# EAGLE board Protoboard-02 (EAGLE 5.06), part 1 of 2
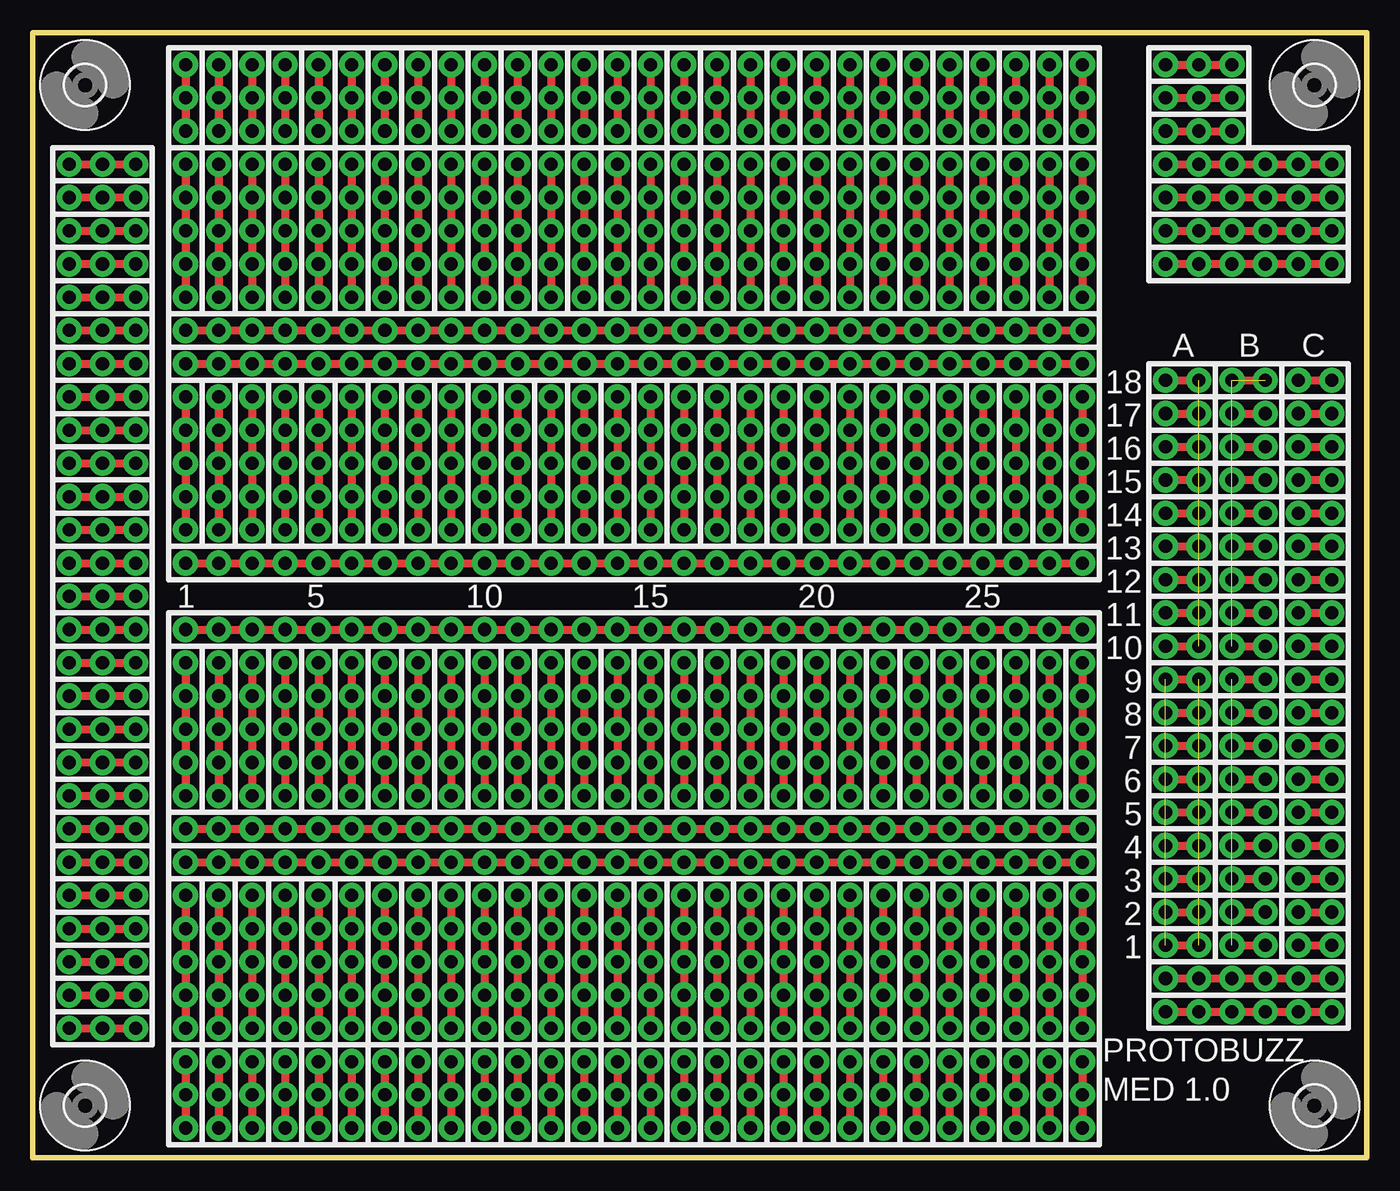
[diagram p0: board, top side]
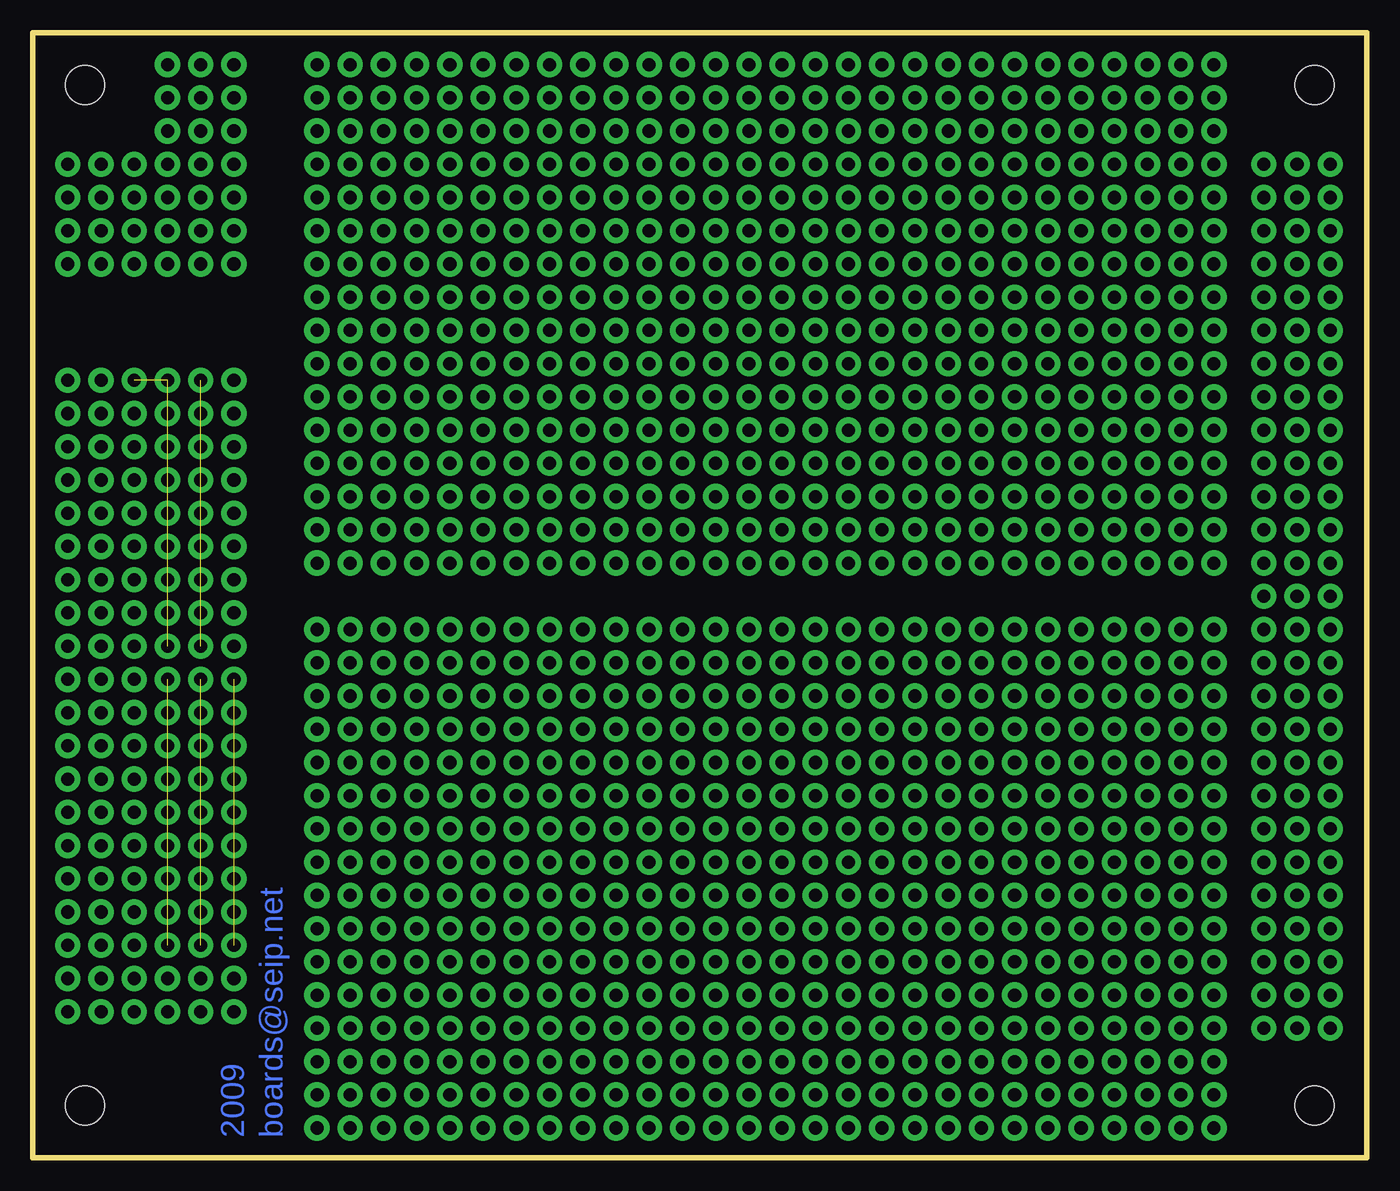
[diagram p1: board, bottom side, seen from below]

Size 102 x 86 mm. Coordinates in mm from the lower left corner, seen from the top.
Outline: 0,0 0,86 102,86 102,0 0,0
Copper layers (1*16): Top 0.035mm / dielectric 1.5mm / Bottom 0.035mm
Design rules "PCB-POOL": minimum track width 6mil, minimum drill 12mil, track to track 6mil, track to pad 6mil, pad to pad 6mil, via to via 6mil, smd to smd 6mil, copper to edge 20mil, drill to drill 8mil, minimum pad ring 8mil, minimum via ring 6mil, stop-mask expansion 3mil, vias tented up to drill 0mil, thermal gap 8mil
Holes 3 mm at 4,82 4,4 98,82 98,4

## Footprints (pad centres in the part's own frame; a part is rotated, then mirrored left to right if it is on the bottom)
3,0 = hole 3: 0,0

## Placement (x,y rotation side)
E$1  [3,0]  4,82 0 top
E$2  [3,0]  98,82 0 top
E$3  [3,0]  98,4 0 top
E$4  [3,0]  4,4 0 top

## Library data of the parts
E$1-E$4 = holes

## Tracks (layer width: path | path; a pad name or v marks a point on that pad's centre or on a via)
S$1  (via drill 1 pad 1.93)
  other vias: 89.15,68.33
S$2  (via drill 1 pad 1.93)
  other vias: 75.18,25.15
S$3  (via drill 1 pad 1.93)
  Top 0.61: v86.61,68.33 v99.31,68.33
S$4  (via drill 1 pad 1.93)
  other vias: 91.69,68.33
S$5  (via drill 1 pad 1.93)
  Top 0.61: v86.61,11.18 v99.31,11.18
S$6  (via drill 1 pad 1.93)
  other vias: 89.15,11.18
S$7  (via drill 1 pad 1.93)
  other vias: 91.69,11.18
S$8  (via drill 1 pad 1.93)  (8 unrouted)
  Top 0.61: v91.69,16.26 v94.23,16.26 | v91.69,36.58 v94.23,36.58 | v91.69,34.04 v94.23,34.04 | v91.69,31.5 v94.23,31.5 | v91.69,28.96 v94.23,28.96 | v91.69,26.42 v94.23,26.42 | v91.69,23.88 v94.23,23.88 | v91.69,21.34 v94.23,21.34 | v91.69,18.8 v94.23,18.8
S$9  (via drill 1 pad 1.93)
  other vias: 75.18,22.61
S$10  (via drill 1 pad 1.93)
  Top 0.61: v86.61,81.03 v91.69,81.03
S$11  (via drill 1 pad 1.93)
  other vias: 75.18,60.71
S$12  (via drill 1 pad 1.93)
  other vias: 96.77,68.33
S$13  (via drill 1 pad 1.93)
  Top 0.61: v86.61,78.49 v91.69,78.49
S$14  (via drill 1 pad 1.93)
  other vias: 89.15,83.57
S$15  (via drill 1 pad 1.93)
  Top 0.61: v86.61,83.57 v91.69,83.57
S$16  (via drill 1 pad 1.93)
  other vias: 5.33,9.91
S$17  (via drill 1 pad 1.93)
  Top 0.61: v86.61,75.95 v99.31,75.95
S$18  (via drill 1 pad 1.93)
  other vias: 89.15,81.03
S$19  (via drill 1 pad 1.93)
  other vias: 89.15,75.95
S$20  (via drill 1 pad 1.93)
  Top 0.61: v2.79,9.91 v7.87,9.91
S$21  (via drill 1 pad 1.93)
  Top 0.61: v2.79,12.45 v7.87,12.45
S$22  (via drill 1 pad 1.93)
  other vias: 5.33,12.45
S$23  (via drill 1 pad 1.93)
  other vias: 75.18,40.39
S$24  (via drill 1 pad 1.93)
  other vias: 91.69,75.95
S$25  (via drill 1 pad 1.93)
  Top 0.61: v2.79,14.99 6.6,14.99
S$26  (via drill 1 pad 1.93)
  other vias: 89.15,78.49
S$27  (via drill 1 pad 1.93)
  other vias: 80.26,12.45
S$28  (via drill 1 pad 1.93)
  Top 0.61: v5.33,14.99 v7.87,14.99
S$29  (via drill 1 pad 1.93)
  other vias: 5.33,17.53
S$30  (via drill 1 pad 1.93)  (8 unrouted)
  Top 0.61: v86.61,59.44 v89.15,59.44 | v86.61,56.9 v89.15,56.9 | v86.61,54.36 v89.15,54.36 | v86.61,51.82 v89.15,51.82 | v86.61,49.28 v89.15,49.28 | v86.61,46.74 v89.15,46.74 | v86.61,44.2 v89.15,44.2 | v86.61,41.66 v89.15,41.66 | v86.61,39.12 v89.15,39.12
S$31  (via drill 1 pad 1.93)  (16 unrouted)
  Top 0.406: v86.61,36.58 v89.15,36.58
  Top 0.61: v86.61,16.26 v89.15,16.26 | v86.61,36.58 v89.15,36.58 | v86.61,34.04 v89.15,34.04 | v86.61,31.5 v89.15,31.5 | v86.61,28.96 v89.15,28.96 | v86.61,26.42 v89.15,26.42 | v86.61,23.88 v89.15,23.88 | v86.61,21.34 v89.15,21.34 | v86.61,18.8 v89.15,18.8
S$32  (via drill 1 pad 1.93)
  Top 0.61: v2.79,17.53 v7.87,17.53
S$33  (via drill 1 pad 1.93)
  Top 0.61: v2.79,20.07 v7.87,20.07
S$34  (via drill 1 pad 1.93)
  other vias: 5.33,20.07
S$35  (via drill 1 pad 1.93)
  Top 0.61: v2.79,22.61 v7.87,22.61
S$36  (via drill 1 pad 1.93)
  Top 0.61: v86.61,73.41 v99.31,73.41
S$37  (via drill 1 pad 1.93)
  Top 0.61: v80.26,7.37 v80.26,2.29
S$38  (via drill 1 pad 1.93)
  other vias: 80.26,4.83
S$39  (via drill 1 pad 1.93)
  other vias: 89.15,73.41
S$40  (via drill 1 pad 1.93)
  other vias: 91.69,73.41
S$41  (via drill 1 pad 1.93)
  other vias: 5.33,22.61
S$42  (via drill 1 pad 1.93)
  other vias: 5.33,25.15
S$43  (via drill 1 pad 1.93)
  Top 0.61: v2.79,25.15 v7.87,25.15
S$44  (via drill 1 pad 1.93)
  Top 0.61: v2.79,27.69 v7.87,27.69
S$45  (via drill 1 pad 1.93)
  other vias: 5.33,27.69
S$46  (via drill 1 pad 1.93)
  other vias: 77.72,73.41
S$47  (via drill 1 pad 1.93)
  other vias: 77.72,70.87
S$48  (via drill 1 pad 1.93)
  other vias: 77.72,68.33
S$49  (via drill 1 pad 1.93)
  Top 0.61: v2.79,30.23 v7.87,30.23
S$50  (via drill 1 pad 1.93)
  other vias: 94.23,68.33
S$51  (via drill 1 pad 1.93)
  other vias: 5.33,30.23
S$53  (via drill 1 pad 1.93)
  other vias: 5.33,32.77
S$54  (via drill 1 pad 1.93)
  Top 0.61: v2.79,32.77 v7.87,32.77
S$56  (via drill 1 pad 1.93)
  Top 0.61: v2.79,35.31 v7.87,35.31
S$57  (via drill 1 pad 1.93)
  other vias: 5.33,35.31
S$58  (via drill 1 pad 1.93)
  Top 0.61: v2.79,37.85 v7.87,37.85
S$59  (via drill 1 pad 1.93)
  other vias: 5.33,37.85
S$60  (via drill 1 pad 1.93)
  other vias: 5.33,40.39
S$61  (via drill 1 pad 1.93)
  Top 0.61: v2.79,40.39 v7.87,40.39
S$62  (via drill 1 pad 1.93)
  Top 0.61: v77.72,75.95 v77.72,65.79
S$63  (via drill 1 pad 1.93)
  Top 0.61: v80.26,75.95 v80.26,65.79
S$64  (via drill 1 pad 1.93)
  Top 0.61: v2.79,42.93 v7.87,42.93
S$65  (via drill 1 pad 1.93)
  other vias: 5.33,42.93
S$66  (via drill 1 pad 1.93)
  other vias: 77.72,81.03
S$67  (via drill 1 pad 1.93)
  Top 0.61: v77.72,83.57 v77.72,78.49
S$68  (via drill 1 pad 1.93)
  Top 0.61: v80.26,83.57 v80.26,78.49
S$69  (via drill 1 pad 1.93)
  other vias: 80.26,81.03
S$70  (via drill 1 pad 1.93)
  Top 0.61: v2.79,45.47 v7.87,45.47
S$71  (via drill 1 pad 1.93)
  other vias: 80.26,73.41
S$72  (via drill 1 pad 1.93)
  other vias: 80.26,70.87
S$73  (via drill 1 pad 1.93)
  other vias: 80.26,68.33
S$74  (via drill 1 pad 1.93)
  other vias: 5.33,45.47
S$77  (via drill 1 pad 1.93)
  other vias: 5.33,48.01
S$81  (via drill 1 pad 1.93)
  Top 0.61: v2.79,48.01 v7.87,48.01
S$87  (via drill 1 pad 1.93)
  other vias: 77.72,60.71
S$89  (via drill 1 pad 1.93)
  Top 0.61: v80.26,58.17 v80.26,48.01
S$90  (via drill 1 pad 1.93)
  Top 0.61: v77.72,58.17 v77.72,48.01
S$91  (via drill 1 pad 1.93)
  Top 0.61: v2.79,50.55 v7.87,50.55
S$93  (via drill 1 pad 1.93)
  other vias: 77.72,40.39
S$94  (via drill 1 pad 1.93)
  other vias: 77.72,25.15
S$95  (via drill 1 pad 1.93)
  other vias: 5.33,50.55
S$96  (via drill 1 pad 1.93)
  Top 0.61: v2.79,53.09 v7.87,53.09
S$97  (via drill 1 pad 1.93)
  other vias: 5.33,53.09
S$98  (via drill 1 pad 1.93)
  other vias: 5.33,55.63
S$99  (via drill 1 pad 1.93)
  Top 0.61: v2.79,55.63 v7.87,55.63
S$100  (via drill 1 pad 1.93)
  Top 0.61: v2.79,58.17 v7.87,58.17
S$101  (via drill 1 pad 1.93)
  other vias: 5.33,58.17
S$102  (via drill 1 pad 1.93)
  Top 0.61: v2.79,60.71 v7.87,60.71
S$103  (via drill 1 pad 1.93)
  other vias: 5.33,60.71
S$104  (via drill 1 pad 1.93)
  other vias: 5.33,63.25
S$105  (via drill 1 pad 1.93)
  Top 0.61: v2.79,63.25 v7.87,63.25
S$106  (via drill 1 pad 1.93)
  Top 0.61: v2.79,65.79 v7.87,65.79
S$107  (via drill 1 pad 1.93)
  other vias: 5.33,65.79
S$108  (via drill 1 pad 1.93)
  Top 0.61: v2.79,68.33 v7.87,68.33
S$109  (via drill 1 pad 1.93)
  other vias: 5.33,68.33
S$110  (via drill 1 pad 1.93)
  other vias: 5.33,70.87
S$111  (via drill 1 pad 1.93)
  Top 0.61: v2.79,70.87 v7.87,70.87
S$112  (via drill 1 pad 1.93)
  Top 0.61: v2.79,73.41 v7.87,73.41
S$113  (via drill 1 pad 1.93)
  other vias: 5.33,73.41
S$114  (via drill 1 pad 1.93)
  Top 0.61: v2.79,75.95 v7.87,75.95
S$115  (via drill 1 pad 1.93)
  other vias: 5.33,75.95
S$175  (via drill 1 pad 1.93)
  other vias: 77.72,22.61
S$176  (via drill 1 pad 1.93)
  other vias: 77.72,63.25
S$177  (via drill 1 pad 1.93)
  other vias: 77.72,55.63
S$178  (via drill 1 pad 1.93)
  other vias: 77.72,53.09
S$184  (via drill 1 pad 1.93)
  other vias: 77.72,50.55
S$191  (via drill 1 pad 1.93)
  other vias: 77.72,45.47
S$192  (via drill 1 pad 1.93)
  other vias: 75.18,63.25
S$196  (via drill 1 pad 1.93)
  Top 0.61: v77.72,37.85 v77.72,27.69
S$197  (via drill 1 pad 1.93)
  other vias: 75.18,45.47
S$202  (via drill 1 pad 1.93)
  other vias: 77.72,35.31
S$207  (via drill 1 pad 1.93)
  other vias: 77.72,32.77
S$208  (via drill 1 pad 1.93)
  other vias: 77.72,30.23
S$210  (via drill 1 pad 1.93)
  Top 0.61: v77.72,20.07 v77.72,9.91
S$211  (via drill 1 pad 1.93)
  other vias: 77.72,17.53
S$216  (via drill 1 pad 1.93)
  other vias: 77.72,14.99
S$233  (via drill 1 pad 1.93)
  other vias: 80.26,63.25
S$234  (via drill 1 pad 1.93)
  other vias: 80.26,55.63
S$235  (via drill 1 pad 1.93)
  other vias: 80.26,53.09
S$261  (via drill 1 pad 1.93)
  other vias: 80.26,50.55
S$263  (via drill 1 pad 1.93)
  other vias: 80.26,45.47
S$286  (via drill 1 pad 1.93)
  Top 0.61: v80.26,37.85 v80.26,27.69
S$287  (via drill 1 pad 1.93)
  other vias: 80.26,35.31
S$288  (via drill 1 pad 1.93)
  other vias: 80.26,32.77
S$292  (via drill 1 pad 1.93)
  other vias: 80.26,30.23
S$323  (via drill 1 pad 1.93)
  Top 0.61: v80.26,20.07 v80.26,9.91
S$324  (via drill 1 pad 1.93)
  other vias: 80.26,17.53
S$347  (via drill 1 pad 1.93)
  other vias: 80.26,14.99
S$452  (via drill 1 pad 1.93)
  Top 0.61: v11.68,60.71 v80.26,60.71
S$453  (via drill 1 pad 1.93)
  Top 0.61: v11.68,58.17 v11.68,48.01
S$464  (via drill 1 pad 1.93)
  Top 0.61: v11.68,40.39 v80.26,40.39
S$474  (via drill 1 pad 1.93)
  Top 0.61: v11.68,25.15 v80.26,25.15
S$475  (via drill 1 pad 1.93)
  Top 0.61: v11.68,22.61 v80.26,22.61
S$523  (via drill 1 pad 1.93)
  Top 0.61: v11.68,75.95 v11.68,65.79
S$527  (via drill 1 pad 1.93)
  Top 0.61: v11.68,83.57 v11.68,78.49
S$528  (via drill 1 pad 1.93)
  other vias: 11.68,81.03
S$530  (via drill 1 pad 1.93)
  other vias: 11.68,73.41
S$531  (via drill 1 pad 1.93)
  other vias: 11.68,70.87
S$532  (via drill 1 pad 1.93)
  other vias: 11.68,68.33
S$534  (via drill 1 pad 1.93)
  Top 0.61: v11.68,63.25 80.26,63.25 80.26,62.99 80.52,62.99 80.52,63.25
S$535  (via drill 1 pad 1.93)
  other vias: 11.68,55.63
S$536  (via drill 1 pad 1.93)
  other vias: 11.68,53.09
S$537  (via drill 1 pad 1.93)
  other vias: 11.68,50.55
S$539  (via drill 1 pad 1.93)
  Top 0.61: v11.68,45.47 80.26,45.47 80.26,45.72 80.26,45.21
S$540  (via drill 1 pad 1.93)
  Top 0.61: v11.68,37.85 v11.68,27.69
S$541  (via drill 1 pad 1.93)
  other vias: 11.68,35.31
S$542  (via drill 1 pad 1.93)
  other vias: 11.68,32.77
S$543  (via drill 1 pad 1.93)
  other vias: 11.68,30.23
S$545  (via drill 1 pad 1.93)
  Top 0.61: v11.68,20.07 v11.68,9.91
S$546  (via drill 1 pad 1.93)
  other vias: 11.68,17.53
S$547  (via drill 1 pad 1.93)
  other vias: 11.68,14.99
S$548  (via drill 1 pad 1.93)
  other vias: 11.68,12.45
S$550  (via drill 1 pad 1.93)
  other vias: 94.23,75.95
S$552  (via drill 1 pad 1.93)
  other vias: 96.77,75.95
S$553  (via drill 1 pad 1.93)
  Top 0.61: v11.68,7.37 v11.68,2.29
S$554  (via drill 1 pad 1.93)
  other vias: 11.68,4.83
S$556  (via drill 1 pad 1.93)
  Top 0.61: v14.22,83.57 v14.22,78.49
S$557  (via drill 1 pad 1.93)
  other vias: 14.22,81.03
S$559  (via drill 1 pad 1.93)
  other vias: 14.22,73.41
S$560  (via drill 1 pad 1.93)
  other vias: 14.22,70.87
S$561  (via drill 1 pad 1.93)
  other vias: 14.22,68.33
S$563  (via drill 1 pad 1.93)
  other vias: 14.22,63.25
S$564  (via drill 1 pad 1.93)
  other vias: 14.22,60.71
S$565  (via drill 1 pad 1.93)
  other vias: 16.76,60.71
S$566  (via drill 1 pad 1.93)
  other vias: 19.3,60.71
S$567  (via drill 1 pad 1.93)
  Top 0.61: v19.3,58.17 v19.3,48.01
S$568  (via drill 1 pad 1.93)
  Top 0.61: v16.76,58.17 v16.76,48.01
S$569  (via drill 1 pad 1.93)
  Top 0.61: v14.22,58.17 v14.22,48.01
S$570  (via drill 1 pad 1.93)
  other vias: 14.22,55.63
S$571  (via drill 1 pad 1.93)
  other vias: 14.22,53.09
S$572  (via drill 1 pad 1.93)
  other vias: 14.22,50.55
S$574  (via drill 1 pad 1.93)
  other vias: 14.22,45.47
S$578  (via drill 1 pad 1.93)
  other vias: 19.3,40.39
S$579  (via drill 1 pad 1.93)
  other vias: 16.76,40.39
S$580  (via drill 1 pad 1.93)
  other vias: 14.22,40.39
S$581  (via drill 1 pad 1.93)
  Top 0.61: v14.22,37.85 v14.22,27.69
S$582  (via drill 1 pad 1.93)
  other vias: 14.22,35.31
S$583  (via drill 1 pad 1.93)
  other vias: 14.22,32.77
S$584  (via drill 1 pad 1.93)
  other vias: 14.22,30.23
S$586  (via drill 1 pad 1.93)
  other vias: 14.22,25.15
S$587  (via drill 1 pad 1.93)
  other vias: 16.76,25.15
S$588  (via drill 1 pad 1.93)
  other vias: 19.3,25.15
S$589  (via drill 1 pad 1.93)
  other vias: 19.3,22.61
S$590  (via drill 1 pad 1.93)
  other vias: 16.76,22.61
S$591  (via drill 1 pad 1.93)
  other vias: 14.22,22.61
S$592  (via drill 1 pad 1.93)
  Top 0.61: v14.22,20.07 v14.22,9.91
S$593  (via drill 1 pad 1.93)
  other vias: 14.22,17.53
S$594  (via drill 1 pad 1.93)
  other vias: 14.22,14.99
S$595  (via drill 1 pad 1.93)
  other vias: 14.22,12.45
S$606  (via drill 1 pad 1.93)
  Top 0.61: v14.22,7.37 v14.22,2.29
S$607  (via drill 1 pad 1.93)
  other vias: 14.22,4.83
S$608  (via drill 1 pad 1.93)
  other vias: 16.76,73.41
S$609  (via drill 1 pad 1.93)
  other vias: 16.76,70.87
S$610  (via drill 1 pad 1.93)
  other vias: 16.76,68.33
S$612  (via drill 1 pad 1.93)
  other vias: 16.76,63.25
S$613  (via drill 1 pad 1.93)
  other vias: 16.76,55.63
S$614  (via drill 1 pad 1.93)
  other vias: 16.76,53.09
S$615  (via drill 1 pad 1.93)
  other vias: 16.76,50.55
S$617  (via drill 1 pad 1.93)
  other vias: 16.76,45.47
S$618  (via drill 1 pad 1.93)
  Top 0.61: v16.76,37.85 v16.76,27.69
S$619  (via drill 1 pad 1.93)
  other vias: 16.76,35.31
S$620  (via drill 1 pad 1.93)
  other vias: 16.76,32.77
S$621  (via drill 1 pad 1.93)
  other vias: 16.76,30.23
S$623  (via drill 1 pad 1.93)
  Top 0.61: v16.76,20.07 v16.76,9.91
S$624  (via drill 1 pad 1.93)
  other vias: 16.76,17.53
S$625  (via drill 1 pad 1.93)
  other vias: 16.76,14.99
S$626  (via drill 1 pad 1.93)
  other vias: 16.76,12.45
S$631  (via drill 1 pad 1.93)
  Top 0.61: v16.76,7.37 v16.76,2.29
S$632  (via drill 1 pad 1.93)
  other vias: 16.76,4.83
S$635  (via drill 1 pad 1.93)
  Top 0.61: v14.22,75.95 v14.22,65.79
S$636  (via drill 1 pad 1.93)
  Top 0.61: v16.76,75.95 v16.76,65.79
S$637  (via drill 1 pad 1.93)
  Top 0.61: v19.3,75.95 19.3,67.06
S$639  (via drill 1 pad 1.93)
  other vias: 16.76,81.03
S$640  (via drill 1 pad 1.93)
  Top 0.61: v16.76,83.57 v16.76,78.49
S$641  (via drill 1 pad 1.93)
  Top 0.61: v19.3,83.57 v19.3,78.49
S$642  (via drill 1 pad 1.93)
  other vias: 19.3,81.03
S$644  (via drill 1 pad 1.93)
  other vias: 19.3,73.41
S$645  (via drill 1 pad 1.93)
  other vias: 19.3,70.87
S$646  (via drill 1 pad 1.93)
  Top 0.61: v19.3,68.33 v19.3,65.79
S$648  (via drill 1 pad 1.93)
  other vias: 19.3,63.25
S$649  (via drill 1 pad 1.93)
  other vias: 19.3,55.63
S$650  (via drill 1 pad 1.93)
  other vias: 19.3,53.09
S$651  (via drill 1 pad 1.93)
  other vias: 19.3,50.55
S$653  (via drill 1 pad 1.93)
  other vias: 19.3,45.47
S$654  (via drill 1 pad 1.93)
  Top 0.61: v19.3,37.85 v19.3,27.69
S$655  (via drill 1 pad 1.93)
  other vias: 19.3,35.31
S$656  (via drill 1 pad 1.93)
  other vias: 19.3,32.77
S$657  (via drill 1 pad 1.93)
  other vias: 19.3,30.23
S$659  (via drill 1 pad 1.93)
  Top 0.61: v19.3,20.07 v19.3,9.91
S$660  (via drill 1 pad 1.93)
  other vias: 19.3,17.53
S$661  (via drill 1 pad 1.93)
  other vias: 19.3,14.99
S$662  (via drill 1 pad 1.93)
  other vias: 19.3,12.45
S$665  (via drill 1 pad 1.93)
  other vias: 94.23,73.41
S$666  (via drill 1 pad 1.93)
  other vias: 96.77,73.41
S$667  (via drill 1 pad 1.93)
  Top 0.61: v19.3,7.37 v19.3,2.29
S$668  (via drill 1 pad 1.93)
  other vias: 19.3,4.83
S$670  (via drill 1 pad 1.93)
  Top 0.61: v21.84,83.57 21.84,79.76
S$671  (via drill 1 pad 1.93)
  Top 0.61: v21.84,81.03 v21.84,78.49
S$673  (via drill 1 pad 1.93)
  other vias: 21.84,73.41
S$674  (via drill 1 pad 1.93)
  other vias: 21.84,70.87
S$675  (via drill 1 pad 1.93)
  other vias: 21.84,68.33
S$677  (via drill 1 pad 1.93)
  other vias: 21.84,63.25
S$678  (via drill 1 pad 1.93)
  other vias: 21.84,60.71
S$679  (via drill 1 pad 1.93)
  other vias: 24.38,60.71
S$680  (via drill 1 pad 1.93)
  other vias: 26.92,60.71
S$681  (via drill 1 pad 1.93)
  Top 0.61: v26.92,58.17 v26.92,48.01
S$682  (via drill 1 pad 1.93)
  Top 0.61: v24.38,58.17 v24.38,48.01
S$683  (via drill 1 pad 1.93)
  Top 0.61: v21.84,58.17 v21.84,48.01
S$684  (via drill 1 pad 1.93)
  other vias: 21.84,55.63
S$685  (via drill 1 pad 1.93)
  other vias: 21.84,53.09
S$686  (via drill 1 pad 1.93)
  other vias: 21.84,50.55
S$688  (via drill 1 pad 1.93)
  other vias: 21.84,45.47
S$692  (via drill 1 pad 1.93)
  other vias: 26.92,40.39
S$693  (via drill 1 pad 1.93)
  other vias: 24.38,40.39
S$694  (via drill 1 pad 1.93)
  other vias: 21.84,40.39
S$695  (via drill 1 pad 1.93)
  Top 0.61: v21.84,37.85 v21.84,27.69
S$696  (via drill 1 pad 1.93)
  other vias: 21.84,35.31
S$697  (via drill 1 pad 1.93)
  other vias: 21.84,32.77
S$698  (via drill 1 pad 1.93)
  other vias: 21.84,30.23
S$700  (via drill 1 pad 1.93)
  other vias: 21.84,25.15
S$701  (via drill 1 pad 1.93)
  other vias: 24.38,25.15
S$702  (via drill 1 pad 1.93)
  other vias: 26.92,25.15
S$703  (via drill 1 pad 1.93)
  other vias: 26.92,22.61
S$704  (via drill 1 pad 1.93)
  other vias: 24.38,22.61
S$705  (via drill 1 pad 1.93)
  other vias: 21.84,22.61
S$706  (via drill 1 pad 1.93)
  Top 0.61: v21.84,20.07 v21.84,9.91
S$707  (via drill 1 pad 1.93)
  other vias: 21.84,17.53
S$708  (via drill 1 pad 1.93)
  other vias: 21.84,14.99
S$709  (via drill 1 pad 1.93)
  other vias: 21.84,12.45
S$717  (via drill 1 pad 1.93)
  other vias: 96.77,70.87
S$718  (via drill 1 pad 1.93)
  other vias: 94.23,70.87
S$719  (via drill 1 pad 1.93)
  other vias: 94.23,13.72
S$720  (via drill 1 pad 1.93)
  Top 0.61: v21.84,7.37 v21.84,2.29
S$721  (via drill 1 pad 1.93)
  other vias: 21.84,4.83
S$722  (via drill 1 pad 1.93)
  other vias: 24.38,73.41
S$723  (via drill 1 pad 1.93)
  other vias: 24.38,70.87
S$724  (via drill 1 pad 1.93)
  other vias: 24.38,68.33
S$726  (via drill 1 pad 1.93)
  other vias: 24.38,63.25
S$727  (via drill 1 pad 1.93)
  other vias: 24.38,55.63
S$728  (via drill 1 pad 1.93)
  other vias: 24.38,53.09
S$729  (via drill 1 pad 1.93)
  other vias: 24.38,50.55
S$731  (via drill 1 pad 1.93)
  other vias: 24.38,45.47
S$732  (via drill 1 pad 1.93)
  Top 0.61: v24.38,37.85 v24.38,27.69
S$733  (via drill 1 pad 1.93)
  other vias: 24.38,35.31
S$734  (via drill 1 pad 1.93)
  other vias: 24.38,32.77
S$735  (via drill 1 pad 1.93)
  other vias: 24.38,30.23
S$737  (via drill 1 pad 1.93)
  Top 0.61: v24.38,20.07 v24.38,9.91
S$738  (via drill 1 pad 1.93)
  other vias: 24.38,17.53
S$739  (via drill 1 pad 1.93)
  other vias: 24.38,14.99
S$740  (via drill 1 pad 1.93)
  other vias: 24.38,12.45
S$743  (via drill 1 pad 1.93)
  other vias: 96.77,13.72
S$745  (via drill 1 pad 1.93)
  Top 0.61: v24.38,7.37 v24.38,2.29
S$746  (via drill 1 pad 1.93)
  other vias: 24.38,4.83
S$749  (via drill 1 pad 1.93)
  Top 0.61: v21.84,75.95 v21.84,65.79
S$750  (via drill 1 pad 1.93)
  Top 0.61: v24.38,75.95 v24.38,65.79
S$751  (via drill 1 pad 1.93)
  Top 0.61: v26.92,75.95 v26.92,65.79
S$753  (via drill 1 pad 1.93)
  other vias: 24.38,81.03
S$754  (via drill 1 pad 1.93)
  Top 0.61: v24.38,83.57 v24.38,78.49
S$755  (via drill 1 pad 1.93)
  Top 0.61: v26.92,83.57 v26.92,78.49
S$756  (via drill 1 pad 1.93)
  other vias: 26.92,81.03
S$758  (via drill 1 pad 1.93)
  other vias: 26.92,73.41
S$759  (via drill 1 pad 1.93)
  other vias: 26.92,70.87
S$760  (via drill 1 pad 1.93)
  other vias: 26.92,68.33
S$762  (via drill 1 pad 1.93)
  other vias: 26.92,63.25
S$763  (via drill 1 pad 1.93)
  other vias: 26.92,55.63
S$764  (via drill 1 pad 1.93)
  other vias: 26.92,53.09
S$765  (via drill 1 pad 1.93)
  other vias: 26.92,50.55
S$767  (via drill 1 pad 1.93)
  other vias: 26.92,45.47
S$768  (via drill 1 pad 1.93)
  Top 0.61: v26.92,37.85 v26.92,27.69
S$769  (via drill 1 pad 1.93)
  other vias: 26.92,35.31
S$770  (via drill 1 pad 1.93)
  other vias: 26.92,32.77
S$771  (via drill 1 pad 1.93)
  other vias: 26.92,30.23
S$773  (via drill 1 pad 1.93)
  Top 0.61: v26.92,20.07 v26.92,9.91
S$774  (via drill 1 pad 1.93)
  other vias: 26.92,17.53
S$775  (via drill 1 pad 1.93)
  other vias: 26.92,14.99
S$776  (via drill 1 pad 1.93)
  other vias: 26.92,12.45
S$781  (via drill 1 pad 1.93)
  Top 0.61: v26.92,7.37 v26.92,2.29
S$782  (via drill 1 pad 1.93)
  other vias: 26.92,4.83
S$784  (via drill 1 pad 1.93)
  Top 0.61: v29.46,83.57 v29.46,78.49
S$785  (via drill 1 pad 1.93)
  other vias: 29.46,81.03
S$787  (via drill 1 pad 1.93)
  other vias: 29.46,73.41
S$788  (via drill 1 pad 1.93)
  other vias: 29.46,70.87
S$789  (via drill 1 pad 1.93)
  other vias: 29.46,68.33
S$791  (via drill 1 pad 1.93)
  other vias: 29.46,63.25
S$792  (via drill 1 pad 1.93)
  other vias: 29.46,60.71
S$793  (via drill 1 pad 1.93)
  other vias: 32,60.71
S$794  (via drill 1 pad 1.93)
  other vias: 34.54,60.71
S$795  (via drill 1 pad 1.93)
  Top 0.61: v34.54,58.17 v34.54,48.01
S$796  (via drill 1 pad 1.93)
  Top 0.61: v32,58.17 v32,48.01
S$797  (via drill 1 pad 1.93)
  Top 0.61: v29.46,58.17 v29.46,48.01
S$798  (via drill 1 pad 1.93)
  other vias: 29.46,55.63
S$799  (via drill 1 pad 1.93)
  other vias: 29.46,53.09
S$800  (via drill 1 pad 1.93)
  other vias: 29.46,50.55
S$802  (via drill 1 pad 1.93)
  other vias: 29.46,45.47
S$804  (via drill 1 pad 1.93)
  other vias: 94.23,11.18
S$805  (via drill 1 pad 1.93)
  other vias: 96.77,11.18
S$806  (via drill 1 pad 1.93)
  other vias: 34.54,40.39
S$807  (via drill 1 pad 1.93)
  other vias: 32,40.39
S$808  (via drill 1 pad 1.93)
  other vias: 29.46,40.39
S$809  (via drill 1 pad 1.93)
  Top 0.61: v29.46,37.85 v29.46,27.69
S$810  (via drill 1 pad 1.93)
  other vias: 29.46,35.31
S$811  (via drill 1 pad 1.93)
  other vias: 29.46,32.77
S$812  (via drill 1 pad 1.93)
  other vias: 29.46,30.23
S$814  (via drill 1 pad 1.93)
  other vias: 29.46,25.15
S$815  (via drill 1 pad 1.93)
  other vias: 32,25.15
S$816  (via drill 1 pad 1.93)
  other vias: 34.54,25.15
S$817  (via drill 1 pad 1.93)
  other vias: 34.54,22.61
S$818  (via drill 1 pad 1.93)
  other vias: 32,22.61
S$819  (via drill 1 pad 1.93)
  other vias: 29.46,22.61
S$820  (via drill 1 pad 1.93)
  Top 0.61: v29.46,20.07 v29.46,9.91
S$821  (via drill 1 pad 1.93)
  other vias: 29.46,17.53
S$822  (via drill 1 pad 1.93)
  other vias: 29.46,14.99
S$823  (via drill 1 pad 1.93)
  other vias: 29.46,12.45
S$834  (via drill 1 pad 1.93)
  Top 0.61: v29.46,7.37 v29.46,2.29
S$835  (via drill 1 pad 1.93)
  other vias: 29.46,4.83
S$836  (via drill 1 pad 1.93)
  other vias: 32,73.41
S$837  (via drill 1 pad 1.93)
  other vias: 32,70.87
S$838  (via drill 1 pad 1.93)
  other vias: 32,68.33
S$840  (via drill 1 pad 1.93)
  other vias: 32,63.25
S$841  (via drill 1 pad 1.93)
  other vias: 32,55.63
S$842  (via drill 1 pad 1.93)
  other vias: 32,53.09
S$843  (via drill 1 pad 1.93)
  other vias: 32,50.55
S$845  (via drill 1 pad 1.93)
  other vias: 32,45.47
S$846  (via drill 1 pad 1.93)
  Top 0.61: v32,37.85 v32,27.69
S$847  (via drill 1 pad 1.93)
  other vias: 32,35.31
S$848  (via drill 1 pad 1.93)
  other vias: 32,32.77
S$849  (via drill 1 pad 1.93)
  other vias: 32,30.23
S$851  (via drill 1 pad 1.93)
  Top 0.61: v32,20.07 v32,9.91
S$852  (via drill 1 pad 1.93)
  other vias: 32,17.53
S$853  (via drill 1 pad 1.93)
  other vias: 32,14.99
S$854  (via drill 1 pad 1.93)
  other vias: 32,12.45
S$859  (via drill 1 pad 1.93)
  Top 0.61: v32,7.37 v32,2.29
S$860  (via drill 1 pad 1.93)
  other vias: 32,4.83
S$863  (via drill 1 pad 1.93)
  Top 0.61: v29.46,75.95 v29.46,65.79
S$864  (via drill 1 pad 1.93)
  Top 0.61: v32,75.95 v32,65.79
S$865  (via drill 1 pad 1.93)
  Top 0.61: v34.54,75.95 v34.54,65.79
S$867  (via drill 1 pad 1.93)
  other vias: 32,81.03
S$868  (via drill 1 pad 1.93)
  Top 0.61: v32,83.57 v32,78.49
S$869  (via drill 1 pad 1.93)
  Top 0.61: v34.54,83.57 v34.54,78.49
S$870  (via drill 1 pad 1.93)
  other vias: 34.54,81.03
S$872  (via drill 1 pad 1.93)
  other vias: 34.54,73.41
S$873  (via drill 1 pad 1.93)
  other vias: 34.54,70.87
S$874  (via drill 1 pad 1.93)
  other vias: 34.54,68.33
S$876  (via drill 1 pad 1.93)
  other vias: 34.54,63.25
S$877  (via drill 1 pad 1.93)
  other vias: 34.54,55.63
S$878  (via drill 1 pad 1.93)
  other vias: 34.54,53.09
S$879  (via drill 1 pad 1.93)
  other vias: 34.54,50.55
S$881  (via drill 1 pad 1.93)
  other vias: 34.54,45.47
S$882  (via drill 1 pad 1.93)
  Top 0.61: v34.54,37.85 v34.54,27.69
S$883  (via drill 1 pad 1.93)
  other vias: 34.54,35.31
S$884  (via drill 1 pad 1.93)
  other vias: 34.54,32.77
S$885  (via drill 1 pad 1.93)
  other vias: 34.54,30.23
S$887  (via drill 1 pad 1.93)
  Top 0.61: v34.54,20.07 v34.54,9.91
S$888  (via drill 1 pad 1.93)
  other vias: 34.54,17.53
S$889  (via drill 1 pad 1.93)
  other vias: 34.54,14.99
S$890  (via drill 1 pad 1.93)
  other vias: 34.54,12.45
S$895  (via drill 1 pad 1.93)
  Top 0.61: v34.54,7.37 v34.54,2.29
S$896  (via drill 1 pad 1.93)
  other vias: 34.54,4.83
S$898  (via drill 1 pad 1.93)
  Top 0.61: v37.08,83.57 v37.08,78.49
S$899  (via drill 1 pad 1.93)
  other vias: 37.08,81.03
S$901  (via drill 1 pad 1.93)
  other vias: 37.08,73.41
S$902  (via drill 1 pad 1.93)
  other vias: 37.08,70.87
S$903  (via drill 1 pad 1.93)
  other vias: 37.08,68.33
S$905  (via drill 1 pad 1.93)
  other vias: 37.08,63.25
S$906  (via drill 1 pad 1.93)
  other vias: 37.08,60.71
S$907  (via drill 1 pad 1.93)
  other vias: 39.62,60.71
S$908  (via drill 1 pad 1.93)
  other vias: 42.16,60.71
S$909  (via drill 1 pad 1.93)
  Top 0.61: v42.16,58.17 v42.16,48.01
S$910  (via drill 1 pad 1.93)
  Top 0.61: v39.62,58.17 v39.62,48.01
S$911  (via drill 1 pad 1.93)
  Top 0.61: v37.08,58.17 v37.08,48.01
S$912  (via drill 1 pad 1.93)
  other vias: 37.08,55.63
S$913  (via drill 1 pad 1.93)
  other vias: 37.08,53.09
S$914  (via drill 1 pad 1.93)
  other vias: 37.08,50.55
S$916  (via drill 1 pad 1.93)
  other vias: 37.08,45.47
S$920  (via drill 1 pad 1.93)
  other vias: 42.16,40.39
S$921  (via drill 1 pad 1.93)
  other vias: 39.62,40.39
S$922  (via drill 1 pad 1.93)
  other vias: 37.08,40.39
S$923  (via drill 1 pad 1.93)
  Top 0.61: v37.08,37.85 v37.08,27.69
S$924  (via drill 1 pad 1.93)
  other vias: 37.08,35.31
S$925  (via drill 1 pad 1.93)
  other vias: 37.08,32.77
S$926  (via drill 1 pad 1.93)
  other vias: 37.08,30.23
S$928  (via drill 1 pad 1.93)
  other vias: 37.08,25.15
S$929  (via drill 1 pad 1.93)
  other vias: 39.62,25.15
S$930  (via drill 1 pad 1.93)
  other vias: 42.16,25.15
S$931  (via drill 1 pad 1.93)
  other vias: 42.16,22.61
S$932  (via drill 1 pad 1.93)
  other vias: 39.62,22.61
S$933  (via drill 1 pad 1.93)
  other vias: 37.08,22.61
S$934  (via drill 1 pad 1.93)
  Top 0.61: v37.08,20.07 v37.08,9.91
S$935  (via drill 1 pad 1.93)
  other vias: 37.08,17.53
S$936  (via drill 1 pad 1.93)
  other vias: 37.08,14.99
S$937  (via drill 1 pad 1.93)
  other vias: 37.08,12.45
S$948  (via drill 1 pad 1.93)
  Top 0.61: v37.08,7.37 v37.08,2.29
S$949  (via drill 1 pad 1.93)
  other vias: 37.08,4.83
S$950  (via drill 1 pad 1.93)
  other vias: 39.62,73.41
S$951  (via drill 1 pad 1.93)
  other vias: 39.62,70.87
S$952  (via drill 1 pad 1.93)
  other vias: 39.62,68.33
S$954  (via drill 1 pad 1.93)
  other vias: 39.62,63.25
S$955  (via drill 1 pad 1.93)
  other vias: 39.62,55.63
S$956  (via drill 1 pad 1.93)
  other vias: 39.62,53.09
S$957  (via drill 1 pad 1.93)
  other vias: 39.62,50.55
S$959  (via drill 1 pad 1.93)
  other vias: 39.62,45.47
S$960  (via drill 1 pad 1.93)
  Top 0.61: v39.62,37.85 v39.62,27.69
S$961  (via drill 1 pad 1.93)
  other vias: 39.62,35.31
S$962  (via drill 1 pad 1.93)
  other vias: 39.62,32.77
S$963  (via drill 1 pad 1.93)
  other vias: 39.62,30.23
S$965  (via drill 1 pad 1.93)
  Top 0.61: v39.62,20.07 v39.62,9.91
S$966  (via drill 1 pad 1.93)
  other vias: 39.62,17.53
S$967  (via drill 1 pad 1.93)
  other vias: 39.62,14.99
S$968  (via drill 1 pad 1.93)
  other vias: 39.62,12.45
S$973  (via drill 1 pad 1.93)
  Top 0.61: v39.62,7.37 v39.62,2.29
S$974  (via drill 1 pad 1.93)
  other vias: 39.62,4.83
S$977  (via drill 1 pad 1.93)
  Top 0.61: v37.08,75.95 v37.08,65.79
S$978  (via drill 1 pad 1.93)
  Top 0.61: v39.62,75.95 v39.62,65.79
S$979  (via drill 1 pad 1.93)
  Top 0.61: v42.16,75.95 v42.16,65.79
S$981  (via drill 1 pad 1.93)
  other vias: 39.62,81.03
S$982  (via drill 1 pad 1.93)
  Top 0.61: v39.62,83.57 v39.62,78.49
S$983  (via drill 1 pad 1.93)
  Top 0.61: v42.16,83.57 v42.16,78.49
S$984  (via drill 1 pad 1.93)
  other vias: 42.16,81.03
S$986  (via drill 1 pad 1.93)
  other vias: 42.16,73.41
S$987  (via drill 1 pad 1.93)
  other vias: 42.16,70.87
S$988  (via drill 1 pad 1.93)
  other vias: 42.16,68.33
S$990  (via drill 1 pad 1.93)
  other vias: 42.16,63.25
S$991  (via drill 1 pad 1.93)
  other vias: 42.16,55.63
S$992  (via drill 1 pad 1.93)
  other vias: 42.16,53.09
S$993  (via drill 1 pad 1.93)
  other vias: 42.16,50.55
S$995  (via drill 1 pad 1.93)
  other vias: 42.16,45.47
S$996  (via drill 1 pad 1.93)
  Top 0.61: v42.16,37.85 v42.16,27.69
S$997  (via drill 1 pad 1.93)
  other vias: 42.16,35.31
S$998  (via drill 1 pad 1.93)
  other vias: 42.16,32.77
S$999  (via drill 1 pad 1.93)
  other vias: 42.16,30.23
S$1001  (via drill 1 pad 1.93)
  Top 0.61: v42.16,20.07 v42.16,9.91
S$1002  (via drill 1 pad 1.93)
  other vias: 42.16,17.53
S$1003  (via drill 1 pad 1.93)
  other vias: 42.16,14.99
S$1004  (via drill 1 pad 1.93)
  other vias: 42.16,12.45
S$1009  (via drill 1 pad 1.93)
  Top 0.61: v42.16,7.37 v42.16,2.29
S$1010  (via drill 1 pad 1.93)
  other vias: 42.16,4.83
S$1012  (via drill 1 pad 1.93)
  Top 0.61: v44.7,83.57 v44.7,78.49
S$1013  (via drill 1 pad 1.93)
  other vias: 44.7,81.03
S$1015  (via drill 1 pad 1.93)
  other vias: 44.7,73.41
S$1016  (via drill 1 pad 1.93)
  other vias: 44.7,70.87
S$1017  (via drill 1 pad 1.93)
  other vias: 44.7,68.33
S$1019  (via drill 1 pad 1.93)
  other vias: 44.7,63.25
S$1020  (via drill 1 pad 1.93)
  other vias: 44.7,60.71
S$1021  (via drill 1 pad 1.93)
  other vias: 47.24,60.71
S$1022  (via drill 1 pad 1.93)
  other vias: 49.78,60.71
S$1023  (via drill 1 pad 1.93)
  Top 0.61: v49.78,58.17 v49.78,48.01
S$1024  (via drill 1 pad 1.93)
  Top 0.61: v47.24,58.17 v47.24,48.01
S$1025  (via drill 1 pad 1.93)
  Top 0.61: v44.7,58.17 v44.7,48.01
S$1026  (via drill 1 pad 1.93)
  other vias: 44.7,55.63
S$1027  (via drill 1 pad 1.93)
  other vias: 44.7,53.09
S$1028  (via drill 1 pad 1.93)
  other vias: 44.7,50.55
S$1030  (via drill 1 pad 1.93)
  other vias: 44.7,45.47
S$1034  (via drill 1 pad 1.93)
  other vias: 49.78,40.39
S$1035  (via drill 1 pad 1.93)
  other vias: 47.24,40.39
S$1036  (via drill 1 pad 1.93)
  other vias: 44.7,40.39
S$1037  (via drill 1 pad 1.93)
  Top 0.61: v44.7,37.85 v44.7,27.69
S$1038  (via drill 1 pad 1.93)
  other vias: 44.7,35.31
S$1039  (via drill 1 pad 1.93)
  other vias: 44.7,32.77
S$1040  (via drill 1 pad 1.93)
  other vias: 44.7,30.23
S$1042  (via drill 1 pad 1.93)
  other vias: 44.7,25.15
S$1043  (via drill 1 pad 1.93)
  other vias: 47.24,25.15
S$1044  (via drill 1 pad 1.93)
  other vias: 49.78,25.15
S$1045  (via drill 1 pad 1.93)
  other vias: 49.78,22.61
S$1046  (via drill 1 pad 1.93)
  other vias: 47.24,22.61
S$1047  (via drill 1 pad 1.93)
  other vias: 44.7,22.61
S$1048  (via drill 1 pad 1.93)
  Top 0.61: v44.7,20.07 v44.7,9.91
S$1049  (via drill 1 pad 1.93)
  other vias: 44.7,17.53
S$1050  (via drill 1 pad 1.93)
  other vias: 44.7,14.99
S$1051  (via drill 1 pad 1.93)
  other vias: 44.7,12.45
S$1062  (via drill 1 pad 1.93)
  Top 0.61: v44.7,7.37 v44.7,2.29
S$1063  (via drill 1 pad 1.93)
  other vias: 44.7,4.83
S$1064  (via drill 1 pad 1.93)
  other vias: 47.24,73.41
S$1065  (via drill 1 pad 1.93)
  other vias: 47.24,70.87
S$1066  (via drill 1 pad 1.93)
  other vias: 47.24,68.33
S$1068  (via drill 1 pad 1.93)
  other vias: 47.24,63.25
S$1069  (via drill 1 pad 1.93)
  other vias: 47.24,55.63
S$1070  (via drill 1 pad 1.93)
  other vias: 47.24,53.09
S$1071  (via drill 1 pad 1.93)
  other vias: 47.24,50.55
S$1073  (via drill 1 pad 1.93)
  other vias: 47.24,45.47
S$1074  (via drill 1 pad 1.93)
  Top 0.61: v47.24,37.85 v47.24,27.69
S$1075  (via drill 1 pad 1.93)
  other vias: 47.24,35.31
S$1076  (via drill 1 pad 1.93)
  other vias: 47.24,32.77
S$1077  (via drill 1 pad 1.93)
  other vias: 47.24,30.23
S$1079  (via drill 1 pad 1.93)
  Top 0.61: v47.24,20.07 v47.24,9.91
S$1080  (via drill 1 pad 1.93)
  other vias: 47.24,17.53
S$1081  (via drill 1 pad 1.93)
  other vias: 47.24,14.99
S$1082  (via drill 1 pad 1.93)
  other vias: 47.24,12.45
S$1087  (via drill 1 pad 1.93)
  Top 0.61: v47.24,7.37 v47.24,2.29
S$1088  (via drill 1 pad 1.93)
  other vias: 47.24,4.83
S$1091  (via drill 1 pad 1.93)
  Top 0.61: v44.7,75.95 v44.7,65.79
S$1092  (via drill 1 pad 1.93)
  Top 0.61: v47.24,75.95 v47.24,65.79
S$1093  (via drill 1 pad 1.93)
  Top 0.61: v49.78,75.95 v49.78,65.79
S$1095  (via drill 1 pad 1.93)
  other vias: 47.24,81.03
S$1096  (via drill 1 pad 1.93)
  Top 0.61: v47.24,83.57 v47.24,78.49
S$1097  (via drill 1 pad 1.93)
  Top 0.61: v49.78,83.57 v49.78,78.49
S$1098  (via drill 1 pad 1.93)
  other vias: 49.78,81.03
S$1100  (via drill 1 pad 1.93)
  other vias: 49.78,73.41
S$1101  (via drill 1 pad 1.93)
  other vias: 49.78,70.87
S$1102  (via drill 1 pad 1.93)
  other vias: 49.78,68.33
S$1104  (via drill 1 pad 1.93)
  other vias: 49.78,63.25
S$1105  (via drill 1 pad 1.93)
  other vias: 49.78,55.63
S$1106  (via drill 1 pad 1.93)
  other vias: 49.78,53.09
S$1107  (via drill 1 pad 1.93)
  other vias: 49.78,50.55
S$1109  (via drill 1 pad 1.93)
  other vias: 49.78,45.47
S$1110  (via drill 1 pad 1.93)
  Top 0.61: v49.78,37.85 v49.78,27.69
S$1111  (via drill 1 pad 1.93)
  other vias: 49.78,35.31
S$1112  (via drill 1 pad 1.93)
  other vias: 49.78,32.77
S$1113  (via drill 1 pad 1.93)
  other vias: 49.78,30.23
S$1115  (via drill 1 pad 1.93)
  Top 0.61: v49.78,20.07 v49.78,9.91
S$1116  (via drill 1 pad 1.93)
  other vias: 49.78,17.53
S$1117  (via drill 1 pad 1.93)
  other vias: 49.78,14.99
S$1118  (via drill 1 pad 1.93)
  other vias: 49.78,12.45
S$1123  (via drill 1 pad 1.93)
  Top 0.61: v49.78,7.37 v49.78,2.29
S$1124  (via drill 1 pad 1.93)
  other vias: 49.78,4.83
S$1126  (via drill 1 pad 1.93)
  Top 0.61: v52.32,83.57 v52.32,78.49
S$1127  (via drill 1 pad 1.93)
  other vias: 52.32,81.03
S$1129  (via drill 1 pad 1.93)
  other vias: 52.32,73.41
S$1130  (via drill 1 pad 1.93)
  other vias: 52.32,70.87
S$1131  (via drill 1 pad 1.93)
  other vias: 52.32,68.33
S$1133  (via drill 1 pad 1.93)
  other vias: 52.32,63.25
S$1134  (via drill 1 pad 1.93)
  other vias: 52.32,60.71
S$1135  (via drill 1 pad 1.93)
  other vias: 54.86,60.71
S$1136  (via drill 1 pad 1.93)
  other vias: 57.4,60.71
S$1137  (via drill 1 pad 1.93)
  Top 0.61: v57.4,58.17 v57.4,48.01
S$1138  (via drill 1 pad 1.93)
  Top 0.61: v54.86,58.17 v54.86,48.01
S$1139  (via drill 1 pad 1.93)
  Top 0.61: v52.32,58.17 v52.32,48.01
S$1140  (via drill 1 pad 1.93)
  other vias: 52.32,55.63
S$1141  (via drill 1 pad 1.93)
  other vias: 52.32,53.09
S$1142  (via drill 1 pad 1.93)
  other vias: 52.32,50.55
S$1144  (via drill 1 pad 1.93)
  other vias: 52.32,45.47
S$1148  (via drill 1 pad 1.93)
  other vias: 57.4,40.39
S$1149  (via drill 1 pad 1.93)
  other vias: 54.86,40.39
S$1150  (via drill 1 pad 1.93)
  other vias: 52.32,40.39
S$1151  (via drill 1 pad 1.93)
  Top 0.61: v52.32,37.85 v52.32,27.69
S$1152  (via drill 1 pad 1.93)
  other vias: 52.32,35.31
S$1153  (via drill 1 pad 1.93)
  other vias: 52.32,32.77
S$1154  (via drill 1 pad 1.93)
  other vias: 52.32,30.23
S$1156  (via drill 1 pad 1.93)
  other vias: 52.32,25.15
S$1157  (via drill 1 pad 1.93)
  other vias: 54.86,25.15
S$1158  (via drill 1 pad 1.93)
  other vias: 57.4,25.15
S$1159  (via drill 1 pad 1.93)
  other vias: 57.4,22.61
S$1160  (via drill 1 pad 1.93)
  other vias: 54.86,22.61
S$1161  (via drill 1 pad 1.93)
  other vias: 52.32,22.61
S$1162  (via drill 1 pad 1.93)
  Top 0.61: v52.32,20.07 v52.32,9.91
S$1163  (via drill 1 pad 1.93)
  other vias: 52.32,17.53
S$1164  (via drill 1 pad 1.93)
  other vias: 52.32,14.99
S$1165  (via drill 1 pad 1.93)
  other vias: 52.32,12.45
S$1176  (via drill 1 pad 1.93)
  Top 0.61: v52.32,7.37 v52.32,2.29
S$1177  (via drill 1 pad 1.93)
  other vias: 52.32,4.83
S$1178  (via drill 1 pad 1.93)
  other vias: 54.86,73.41
S$1179  (via drill 1 pad 1.93)
  other vias: 54.86,70.87
S$1180  (via drill 1 pad 1.93)
  other vias: 54.86,68.33
S$1182  (via drill 1 pad 1.93)
  other vias: 54.86,63.25
S$1183  (via drill 1 pad 1.93)
  other vias: 54.86,55.63
S$1184  (via drill 1 pad 1.93)
  other vias: 54.86,53.09
S$1185  (via drill 1 pad 1.93)
  other vias: 54.86,50.55
S$1187  (via drill 1 pad 1.93)
  other vias: 54.86,45.47
S$1188  (via drill 1 pad 1.93)
  Top 0.61: v54.86,37.85 v54.86,27.69
S$1189  (via drill 1 pad 1.93)
  other vias: 54.86,35.31
S$1190  (via drill 1 pad 1.93)
  other vias: 54.86,32.77
S$1191  (via drill 1 pad 1.93)
  other vias: 54.86,30.23
S$1193  (via drill 1 pad 1.93)
  Top 0.61: v54.86,20.07 v54.86,9.91
S$1194  (via drill 1 pad 1.93)
  other vias: 54.86,17.53
S$1195  (via drill 1 pad 1.93)
  other vias: 54.86,14.99
S$1196  (via drill 1 pad 1.93)
  other vias: 54.86,12.45
S$1201  (via drill 1 pad 1.93)
  Top 0.61: v54.86,7.37 v54.86,2.29
S$1202  (via drill 1 pad 1.93)
  other vias: 54.86,4.83
S$1205  (via drill 1 pad 1.93)
  Top 0.61: v52.32,75.95 v52.32,65.79
S$1206  (via drill 1 pad 1.93)
  Top 0.61: v54.86,75.95 v54.86,65.79
S$1207  (via drill 1 pad 1.93)
  Top 0.61: v57.4,75.95 v57.4,65.79
S$1209  (via drill 1 pad 1.93)
  other vias: 54.86,81.03
S$1210  (via drill 1 pad 1.93)
  Top 0.61: v54.86,83.57 v54.86,78.49
S$1211  (via drill 1 pad 1.93)
  Top 0.61: v57.4,83.57 v57.4,78.49
S$1212  (via drill 1 pad 1.93)
  other vias: 57.4,81.03
S$1214  (via drill 1 pad 1.93)
  other vias: 57.4,73.41
S$1215  (via drill 1 pad 1.93)
  other vias: 57.4,70.87
S$1216  (via drill 1 pad 1.93)
  other vias: 57.4,68.33
S$1218  (via drill 1 pad 1.93)
  other vias: 57.4,63.25
S$1219  (via drill 1 pad 1.93)
  other vias: 57.4,55.63
S$1220  (via drill 1 pad 1.93)
  other vias: 57.4,53.09
S$1221  (via drill 1 pad 1.93)
  other vias: 57.4,50.55
S$1223  (via drill 1 pad 1.93)
  other vias: 57.4,45.47
S$1224  (via drill 1 pad 1.93)
  Top 0.61: v57.4,37.85 v57.4,27.69
S$1225  (via drill 1 pad 1.93)
  other vias: 57.4,35.31
S$1226  (via drill 1 pad 1.93)
  other vias: 57.4,32.77
S$1227  (via drill 1 pad 1.93)
  other vias: 57.4,30.23
S$1229  (via drill 1 pad 1.93)
  Top 0.61: v57.4,20.07 v57.4,9.91
S$1230  (via drill 1 pad 1.93)
  other vias: 57.4,17.53
S$1231  (via drill 1 pad 1.93)
  other vias: 57.4,14.99
S$1232  (via drill 1 pad 1.93)
  other vias: 57.4,12.45
S$1237  (via drill 1 pad 1.93)
  Top 0.61: v57.4,7.37 v57.4,2.29
S$1238  (via drill 1 pad 1.93)
  other vias: 57.4,4.83
S$1240  (via drill 1 pad 1.93)
  Top 0.61: v59.94,83.57 v59.94,78.49
S$1241  (via drill 1 pad 1.93)
  other vias: 59.94,81.03
S$1243  (via drill 1 pad 1.93)
  other vias: 59.94,73.41
S$1244  (via drill 1 pad 1.93)
  other vias: 59.94,70.87
S$1245  (via drill 1 pad 1.93)
  other vias: 59.94,68.33
S$1247  (via drill 1 pad 1.93)
  other vias: 59.94,63.25
S$1248  (via drill 1 pad 1.93)
  other vias: 59.94,60.71
S$1249  (via drill 1 pad 1.93)
  other vias: 62.48,60.71
S$1250  (via drill 1 pad 1.93)
  other vias: 65.02,60.71
S$1251  (via drill 1 pad 1.93)
  Top 0.61: v65.02,58.17 v65.02,48.01
S$1252  (via drill 1 pad 1.93)
  Top 0.61: v62.48,58.17 v62.48,48.01
S$1253  (via drill 1 pad 1.93)
  Top 0.61: v59.94,58.17 v59.94,48.01
S$1254  (via drill 1 pad 1.93)
  other vias: 59.94,55.63
S$1255  (via drill 1 pad 1.93)
  other vias: 59.94,53.09
S$1256  (via drill 1 pad 1.93)
  other vias: 59.94,50.55
S$1258  (via drill 1 pad 1.93)
  other vias: 59.94,45.47
S$1262  (via drill 1 pad 1.93)
  other vias: 65.02,40.39
S$1263  (via drill 1 pad 1.93)
  other vias: 62.48,40.39
S$1264  (via drill 1 pad 1.93)
  other vias: 59.94,40.39
S$1265  (via drill 1 pad 1.93)
  Top 0.61: v59.94,37.85 v59.94,27.69
S$1266  (via drill 1 pad 1.93)
  other vias: 59.94,35.31
S$1267  (via drill 1 pad 1.93)
  other vias: 59.94,32.77
S$1268  (via drill 1 pad 1.93)
  other vias: 59.94,30.23
S$1270  (via drill 1 pad 1.93)
  other vias: 59.94,25.15
S$1271  (via drill 1 pad 1.93)
  other vias: 62.48,25.15
S$1272  (via drill 1 pad 1.93)
  other vias: 65.02,25.15
S$1273  (via drill 1 pad 1.93)
  other vias: 65.02,22.61
S$1274  (via drill 1 pad 1.93)
  other vias: 62.48,22.61
S$1275  (via drill 1 pad 1.93)
  other vias: 59.94,22.61
S$1276  (via drill 1 pad 1.93)
  Top 0.61: v59.94,20.07 v59.94,9.91
S$1277  (via drill 1 pad 1.93)
  other vias: 59.94,17.53
S$1278  (via drill 1 pad 1.93)
  other vias: 59.94,14.99
S$1279  (via drill 1 pad 1.93)
  other vias: 59.94,12.45
S$1290  (via drill 1 pad 1.93)
  Top 0.61: v59.94,7.37 v59.94,2.29
S$1291  (via drill 1 pad 1.93)
  other vias: 59.94,4.83
S$1292  (via drill 1 pad 1.93)
  other vias: 62.48,73.41
S$1293  (via drill 1 pad 1.93)
  other vias: 62.48,70.87
S$1294  (via drill 1 pad 1.93)
  other vias: 62.48,68.33
S$1296  (via drill 1 pad 1.93)
  other vias: 62.48,63.25
S$1297  (via drill 1 pad 1.93)
  other vias: 62.48,55.63
S$1298  (via drill 1 pad 1.93)
  other vias: 62.48,53.09
S$1299  (via drill 1 pad 1.93)
  other vias: 62.48,50.55
S$1301  (via drill 1 pad 1.93)
  other vias: 62.48,45.47
S$1302  (via drill 1 pad 1.93)
  Top 0.61: v62.48,37.85 v62.48,27.69
S$1303  (via drill 1 pad 1.93)
  other vias: 62.48,35.31
S$1304  (via drill 1 pad 1.93)
  other vias: 62.48,32.77
S$1305  (via drill 1 pad 1.93)
  other vias: 62.48,30.23
S$1307  (via drill 1 pad 1.93)
  Top 0.61: v62.48,20.07 v62.48,9.91
S$1308  (via drill 1 pad 1.93)
  other vias: 62.48,17.53
S$1309  (via drill 1 pad 1.93)
  other vias: 62.48,14.99
S$1310  (via drill 1 pad 1.93)
  other vias: 62.48,12.45
S$1315  (via drill 1 pad 1.93)
  Top 0.61: v62.48,7.37 v62.48,2.29
S$1316  (via drill 1 pad 1.93)
  other vias: 62.48,4.83
S$1319  (via drill 1 pad 1.93)
  Top 0.61: v59.94,75.95 v59.94,65.79
S$1320  (via drill 1 pad 1.93)
  Top 0.61: v62.48,75.95 v62.48,65.79
S$1321  (via drill 1 pad 1.93)
  Top 0.61: v65.02,75.95 v65.02,65.79
S$1323  (via drill 1 pad 1.93)
  other vias: 62.48,81.03
S$1324  (via drill 1 pad 1.93)
  Top 0.61: v62.48,83.57 v62.48,78.49
S$1325  (via drill 1 pad 1.93)
  Top 0.61: v65.02,83.57 v65.02,78.49
S$1326  (via drill 1 pad 1.93)
  other vias: 65.02,81.03
S$1328  (via drill 1 pad 1.93)
  other vias: 65.02,73.41
S$1329  (via drill 1 pad 1.93)
  other vias: 65.02,70.87
S$1330  (via drill 1 pad 1.93)
  other vias: 65.02,68.33
S$1332  (via drill 1 pad 1.93)
  other vias: 65.02,63.25
S$1333  (via drill 1 pad 1.93)
  other vias: 65.02,55.63
S$1334  (via drill 1 pad 1.93)
  other vias: 65.02,53.09
S$1335  (via drill 1 pad 1.93)
  other vias: 65.02,50.55
S$1337  (via drill 1 pad 1.93)
  other vias: 65.02,45.47
S$1338  (via drill 1 pad 1.93)
  Top 0.61: v65.02,37.85 v65.02,27.69
S$1339  (via drill 1 pad 1.93)
  other vias: 65.02,35.31
S$1340  (via drill 1 pad 1.93)
  other vias: 65.02,32.77
S$1341  (via drill 1 pad 1.93)
  other vias: 65.02,30.23
S$1343  (via drill 1 pad 1.93)
  Top 0.61: v65.02,20.07 v65.02,9.91
S$1344  (via drill 1 pad 1.93)
  other vias: 65.02,17.53
S$1345  (via drill 1 pad 1.93)
  other vias: 65.02,14.99
S$1346  (via drill 1 pad 1.93)
  other vias: 65.02,12.45
S$1351  (via drill 1 pad 1.93)
  Top 0.61: v65.02,7.37 v65.02,2.29
S$1352  (via drill 1 pad 1.93)
  other vias: 65.02,4.83
S$1354  (via drill 1 pad 1.93)
  Top 0.61: v67.56,83.57 v67.56,78.49
S$1355  (via drill 1 pad 1.93)
  other vias: 67.56,81.03
S$1357  (via drill 1 pad 1.93)
  other vias: 67.56,73.41
S$1358  (via drill 1 pad 1.93)
  other vias: 67.56,70.87
S$1359  (via drill 1 pad 1.93)
  other vias: 67.56,68.33
S$1361  (via drill 1 pad 1.93)
  other vias: 67.56,63.25
S$1362  (via drill 1 pad 1.93)
  other vias: 67.56,60.71
S$1363  (via drill 1 pad 1.93)
  other vias: 70.1,60.71
S$1364  (via drill 1 pad 1.93)
  other vias: 72.64,60.71
S$1365  (via drill 1 pad 1.93)
  Top 0.61: v72.64,58.17 v72.64,48.01
S$1366  (via drill 1 pad 1.93)
  Top 0.61: v70.1,58.17 v70.1,48.01
S$1367  (via drill 1 pad 1.93)
  Top 0.61: v67.56,58.17 v67.56,48.01
S$1368  (via drill 1 pad 1.93)
  other vias: 67.56,55.63
S$1369  (via drill 1 pad 1.93)
  other vias: 67.56,53.09
S$1370  (via drill 1 pad 1.93)
  other vias: 67.56,50.55
S$1372  (via drill 1 pad 1.93)
  other vias: 67.56,45.47
S$1376  (via drill 1 pad 1.93)
  other vias: 72.64,40.39
S$1377  (via drill 1 pad 1.93)
  other vias: 70.1,40.39
S$1378  (via drill 1 pad 1.93)
  other vias: 67.56,40.39
S$1379  (via drill 1 pad 1.93)
  Top 0.61: v67.56,37.85 v67.56,27.69
S$1380  (via drill 1 pad 1.93)
  other vias: 67.56,35.31
S$1381  (via drill 1 pad 1.93)
  other vias: 67.56,32.77
S$1382  (via drill 1 pad 1.93)
  other vias: 67.56,30.23
S$1384  (via drill 1 pad 1.93)
  other vias: 67.56,25.15
S$1385  (via drill 1 pad 1.93)
  other vias: 70.1,25.15
S$1386  (via drill 1 pad 1.93)
  other vias: 72.64,25.15
S$1387  (via drill 1 pad 1.93)
  other vias: 72.64,22.61
S$1388  (via drill 1 pad 1.93)
  other vias: 70.1,22.61
S$1389  (via drill 1 pad 1.93)
  other vias: 67.56,22.61
S$1390  (via drill 1 pad 1.93)
  Top 0.61: v67.56,20.07 v67.56,9.91
S$1391  (via drill 1 pad 1.93)
  other vias: 67.56,17.53
S$1392  (via drill 1 pad 1.93)
  other vias: 67.56,14.99
S$1393  (via drill 1 pad 1.93)
  other vias: 67.56,12.45
S$1404  (via drill 1 pad 1.93)
  Top 0.61: v67.56,7.37 v67.56,2.29
S$1405  (via drill 1 pad 1.93)
  other vias: 67.56,4.83
S$1406  (via drill 1 pad 1.93)
  other vias: 70.1,73.41
S$1407  (via drill 1 pad 1.93)
  other vias: 70.1,70.87
S$1408  (via drill 1 pad 1.93)
  other vias: 70.1,68.33
S$1410  (via drill 1 pad 1.93)
  other vias: 70.1,63.25
S$1411  (via drill 1 pad 1.93)
  other vias: 70.1,55.63
S$1412  (via drill 1 pad 1.93)
  other vias: 70.1,53.09
S$1413  (via drill 1 pad 1.93)
  other vias: 70.1,50.55
S$1415  (via drill 1 pad 1.93)
  other vias: 70.1,45.47
S$1416  (via drill 1 pad 1.93)
  Top 0.61: v70.1,37.85 v70.1,27.69
S$1417  (via drill 1 pad 1.93)
  other vias: 70.1,35.31
S$1418  (via drill 1 pad 1.93)
  other vias: 70.1,32.77
S$1419  (via drill 1 pad 1.93)
  other vias: 70.1,30.23
S$1421  (via drill 1 pad 1.93)
  Top 0.61: v70.1,20.07 v70.1,9.91
S$1422  (via drill 1 pad 1.93)
  other vias: 70.1,17.53
S$1423  (via drill 1 pad 1.93)
  other vias: 70.1,14.99
S$1424  (via drill 1 pad 1.93)
  other vias: 70.1,12.45
S$1429  (via drill 1 pad 1.93)
  Top 0.61: v70.1,7.37 v70.1,2.29
S$1430  (via drill 1 pad 1.93)
  other vias: 70.1,4.83
S$1433  (via drill 1 pad 1.93)
  Top 0.61: v67.56,75.95 v67.56,65.79
S$1434  (via drill 1 pad 1.93)
  Top 0.61: v70.1,75.95 v70.1,65.79
S$1435  (via drill 1 pad 1.93)
  Top 0.61: v72.64,75.95 v72.64,65.79
S$1437  (via drill 1 pad 1.93)
  other vias: 70.1,81.03
S$1438  (via drill 1 pad 1.93)
  Top 0.61: v70.1,83.57 v70.1,78.49
S$1439  (via drill 1 pad 1.93)
  Top 0.61: v72.64,83.57 v72.64,78.49
S$1440  (via drill 1 pad 1.93)
  other vias: 72.64,81.03
S$1442  (via drill 1 pad 1.93)
  other vias: 72.64,73.41
S$1443  (via drill 1 pad 1.93)
  other vias: 72.64,70.87
S$1444  (via drill 1 pad 1.93)
  other vias: 72.64,68.33
S$1446  (via drill 1 pad 1.93)
  other vias: 72.64,63.25
S$1447  (via drill 1 pad 1.93)
  other vias: 72.64,55.63
S$1448  (via drill 1 pad 1.93)
  other vias: 72.64,53.09
S$1449  (via drill 1 pad 1.93)
  other vias: 72.64,50.55
S$1451  (via drill 1 pad 1.93)
  other vias: 72.64,45.47
S$1452  (via drill 1 pad 1.93)
  Top 0.61: v72.64,37.85 v72.64,27.69
S$1453  (via drill 1 pad 1.93)
  other vias: 72.64,35.31
S$1454  (via drill 1 pad 1.93)
  other vias: 72.64,32.77
S$1455  (via drill 1 pad 1.93)
  other vias: 72.64,30.23
S$1457  (via drill 1 pad 1.93)
  Top 0.61: v72.64,20.07 v72.64,9.91
S$1458  (via drill 1 pad 1.93)
  other vias: 72.64,17.53
S$1459  (via drill 1 pad 1.93)
  other vias: 72.64,14.99
S$1460  (via drill 1 pad 1.93)
  other vias: 72.64,12.45
S$1465  (via drill 1 pad 1.93)
  Top 0.61: v72.64,7.37 v72.64,2.29
S$1466  (via drill 1 pad 1.93)
  other vias: 72.64,4.83
S$1468  (via drill 1 pad 1.93)
  Top 0.61: v75.18,83.57 v75.18,78.49
S$1469  (via drill 1 pad 1.93)
  other vias: 75.18,81.03
S$1471  (via drill 1 pad 1.93)
  other vias: 75.18,73.41
S$1472  (via drill 1 pad 1.93)
  other vias: 75.18,70.87
S$1473  (via drill 1 pad 1.93)
  other vias: 75.18,68.33
S$1481  (via drill 1 pad 1.93)
  Top 0.61: v75.18,58.17 v75.18,48.01
S$1482  (via drill 1 pad 1.93)
  other vias: 75.18,55.63
S$1483  (via drill 1 pad 1.93)
  other vias: 75.18,53.09
S$1484  (via drill 1 pad 1.93)
  other vias: 75.18,50.55
S$1493  (via drill 1 pad 1.93)
  Top 0.61: v75.18,37.85 v75.18,27.69
S$1494  (via drill 1 pad 1.93)
  other vias: 75.18,35.31
S$1495  (via drill 1 pad 1.93)
  other vias: 75.18,32.77
S$1496  (via drill 1 pad 1.93)
  other vias: 75.18,30.23
S$1504  (via drill 1 pad 1.93)
  Top 0.61: v75.18,20.07 v75.18,9.91
S$1505  (via drill 1 pad 1.93)
  other vias: 75.18,17.53
S$1506  (via drill 1 pad 1.93)
  other vias: 75.18,14.99
S$1507  (via drill 1 pad 1.93)
  other vias: 75.18,12.45
S$1518  (via drill 1 pad 1.93)
  Top 0.61: v75.18,7.37 v75.18,2.29
S$1519  (via drill 1 pad 1.93)
  other vias: 75.18,4.83
S$1538  (via drill 1 pad 1.93)
  other vias: 77.72,12.45
S$1543  (via drill 1 pad 1.93)
  Top 0.61: v77.72,7.37 v77.72,2.29
S$1544  (via drill 1 pad 1.93)
  other vias: 77.72,4.83
S$1547  (via drill 1 pad 1.93)
  Top 0.61: v75.18,75.95 v75.18,65.79
S$1592  (via drill 1 pad 1.93)